# Altium PCB 4WD_V1.0.PcbDoc
Units mil, origin at the board's own origin, x right, y up, seen from the top; angles counter-clockwise.
Board outline 6000 x 4000 mil, 2 copper layers (Top Layer, Bottom Layer); 10 components, 0 nets, 40 pads, 0 vias.
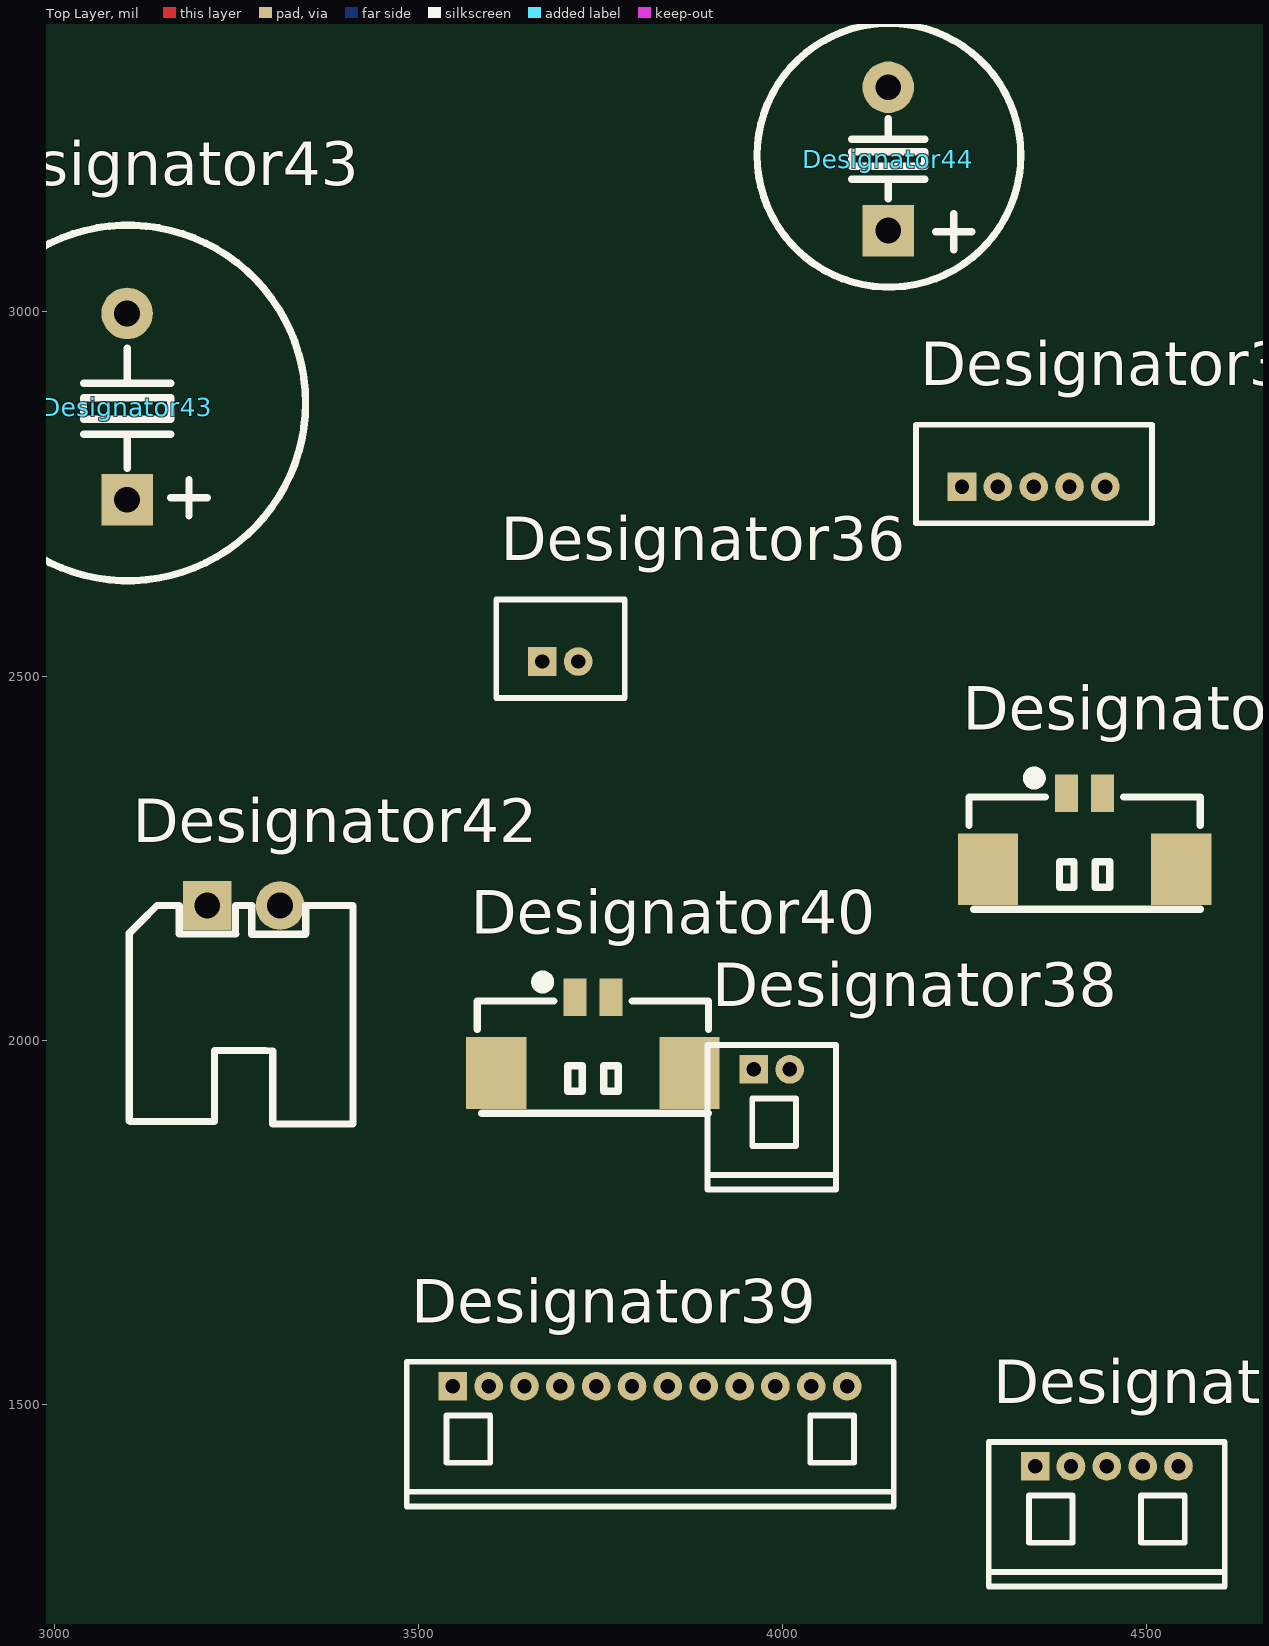
[diagram p0: Top Layer view]
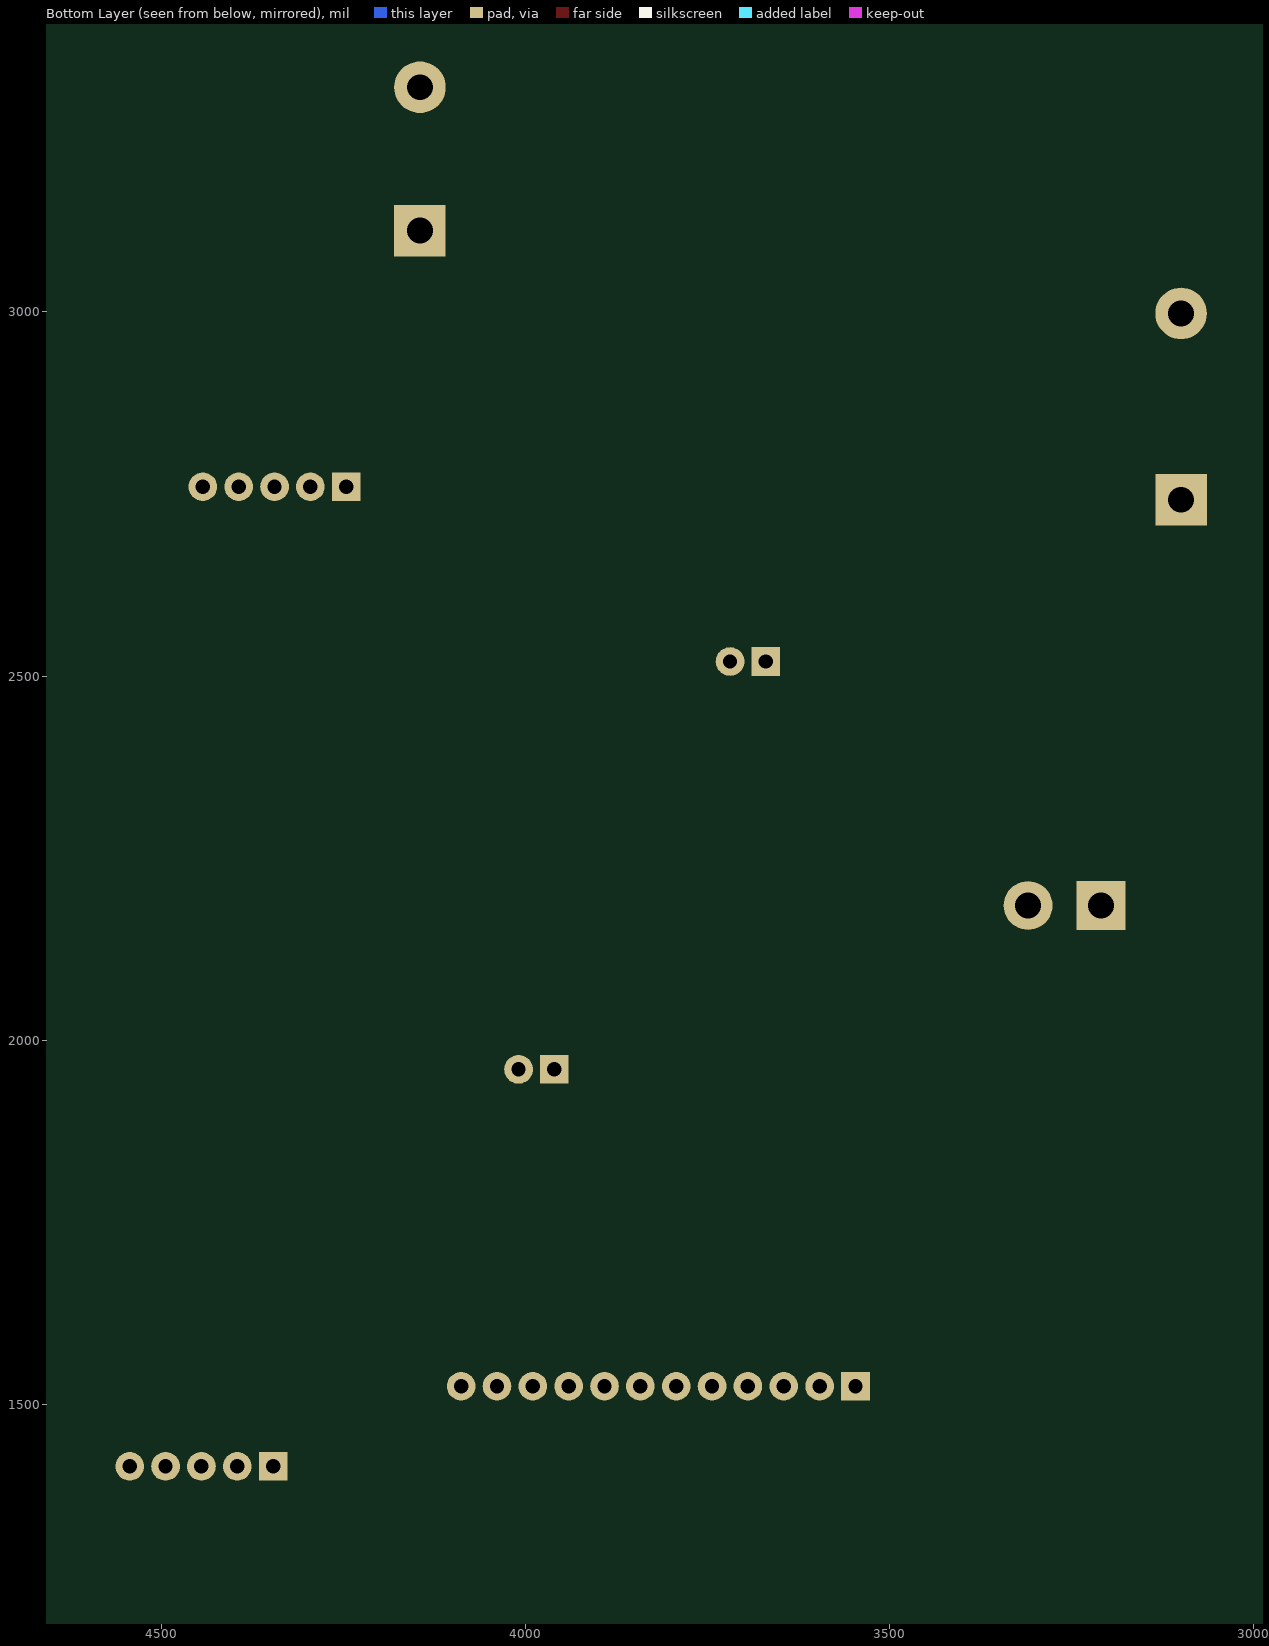
[diagram p1: Bottom Layer view, seen from below]

## Layer stack, top to bottom
Top Solder: solder mask 0.4, Solder Resist, Dk 3.5
Top Layer: signal copper 1.4
Dielectric 1: dielectric 12.6, FR-4, Dk 4.8
Bottom Layer: signal copper 1.4
Bottom Solder: solder mask 0.4, Solder Resist, Dk 3.5

## Board outline
1000,1000 7000,1000 7000,5000 1000,5000

## Design rules (kind name [scope] priority, off if disabled: settings)
Clearance [All] p1: gap=10
PolygonConnect [All] p1: connectstyle=Relief reliefconductorwidth=10 reliefentries=4 polygonreliefangle="90 Angle" airgapwidth=10
RoutingVias [All] p1: holewidth=28 width=50 viastyle="Through Hole" minholewidth=28 minwidth=50 maxholewidth=28 maxwidth=50
SolderMaskExpansion [All] p1: expansion=4
Width [All] p1: maxlimit=10 minlimit=10 preferedwidth=10
30 further rules are at their usual default settings.

## Components (designator, comment, footprint, x,y, rotation, side; value= is the part's Value field where it differs from the comment)
Designator35 "Comment" "MX 1.25-LI-5P" 4345,2760 r0 top
Designator36 "Comment" "MX 1.25-LI-2P" 3695,2520 r0 top
Designator37 "Comment" "MX 1.25-LS-2P" 4415,2250 r0 top
Designator38 "Comment" "MX 1.25-WI-2P" 3985,1960 r0 top
Designator39 "Comment" "MX 1.25-WI-12P" 3818.15,1525 r0 top
Designator40 "Comment" "MX 1.25-LS-2P" 3740,1970 r0 top
Designator41 "Comment" "MX 1.25-WI-5P" 4445,1415 r0 top
Designator42 "Comment" XH2.54-WI-2P 3260,2185 r0 top
Designator43 "Comment" "BEEP 6.5x12x8.5" 3100,2870 r0 top
Designator44 "Comment" "BEEP 5x9x5.5" 4145,3210 r0 top

## Footprints (in the part's own frame and the unit in brackets; to place one, negate y for a bottom-side part, rotate by r counter-clockwise, add the part's x,y. Pads: shape width x height; smd on the part's side, far side on the other; paste and mask are expansions set on the pad)
"BEEP 5x9x5.5" [mm] "5*9*5.5mm(脚距,直径,高度)"
  rect 1.8x1.8 hole 0.9: 1(0,-2.5)
  round 1.8 hole 0.9: 2(0,2.5)
  silkscreen extent -4.58,-4.47 4.62,4.72, body extent -4.5,-4.5 4.5,4.5, height 5.45
"BEEP 6.5x12x8.5" [mm] "6.5*12*8.5mm(脚距,直径,高度)"
  rect 1.8x1.8 hole 0.9: 1(0,-3.25)
  round 1.8 hole 0.9: 2(0,3.25)
  silkscreen extent -6.18,-6.07 6.22,6.32, body extent -6,-6 6,6, height 8.55
"MX 1.25-LI-2P" [mm] "长：4.25mm，宽：3.2mm，高：4.2mm"
  rect 1x1 hole 0.5: 1(-0.635,0)
  round 1 hole 0.5: 2(0.615,0)
  silkscreen extent -2.24,-1.27 2.24,2.16, body extent -2.12,-1.15 2.12,2.05, height 4.25
"MX 1.25-LI-5P" [mm] "长：8mm，宽：3.2mm，高：4.2mm"
  rect 1x1 hole 0.5: 1(-2.51,0)
  round 1 hole 0.5: 2(-1.26,0) 3(-0.01,0) 4(1.24,0) 5(2.49,0)
  silkscreen extent -4.11,-1.27 4.11,2.16, body extent -4,-1.15 4,2.05, height 4.25
"MX 1.25-LS-2P" [mm] "长：7.25m，宽：3.7mm，高：4.7mm"
  rect 2.1x2.5 smd: 0(-3.382,-0.381) 0(3.354,-0.381)
  rect 0.8x1.3 smd: 1(-0.639,2.261) 2(0.611,2.261)
  silkscreen extent -4.04,-1.78 4.02,2.99, body extent -3.83,-1.6 3.83,2.5, height 4.7
"MX 1.25-WI-2P" [mm] "长：4.25mm，宽：1.8mm，高：3.3mm"
  rect 1x1 hole 0.5: 1(-0.625,0)
  round 1 hole 0.5: 2(0.625,0)
  silkscreen extent -2.24,-4.19 2.24,0.85, body extent -2.12,-4.05 2.12,0.85, height 3.35
"MX 1.25-WI-5P" [mm] "长：8mm，宽：1.8mm，高：3.3mm"
  rect 1x1 hole 0.5: 1(-2.5,0)
  round 1 hole 0.5: 2(-1.25,0) 3(0,0) 4(1.25,0) 5(2.5,0)
  silkscreen extent -4.11,-4.19 4.11,0.85, body extent -4,-4.05 4,0.85, height 3.35
"MX 1.25-WI-12P" [mm] "长：16.75mm，宽：1.8mm，高：3.3mm"
  rect 1x1 hole 0.5: 1(-6.885,0)
  round 1 hole 0.5: 2(-5.635,0) 3(-4.385,0) 4(-3.135,0) 5(-1.885,0) 6(-0.635,0) 7(0.615,0) 8(1.865,0) 9(3.115,0) 10(4.365,0) 11(5.615,0) 12(6.865,0)
  silkscreen extent -8.49,-4.19 8.49,0.85, body extent -8.38,-4.05 8.38,0.85, height 3.35
XH2.54-WI-2P [mm] "接插件，2P"
  rect 1.7x1.7 hole 0.9: 1(-1.27,0)
  round 1.7 hole 0.9: 2(1.27,0)
  silkscreen extent -3.99,-7.62 3.81,0, body extent -3.77,-7.35 3.77,0.35, height 5.73

## Nets (pads, with @x,y where several pads share a name; then routed paths per layer and width w, separated by ;. In a path a pad name is that pad's centre, name@x,y a point inside that pad or via, vN(x,y) a via of type N, cw(c..) or ccw(c..) an arc to the next point about the centre after c; other vN are vias at no path point)
pads on no net: Designator35.1 Designator35.2 Designator35.3 Designator35.4 Designator35.5 Designator36.1 Designator36.2 Designator37.0 Designator37.1 Designator37.2 Designator38.1 Designator38.2 Designator39.1 Designator39.2 Designator39.3 Designator39.4 Designator39.5 Designator39.6 Designator39.7 Designator39.8 Designator39.9 Designator39.10 Designator39.11 Designator39.12 Designator40.0 Designator40.1 Designator40.2 Designator41.1 Designator41.2 Designator41.3 Designator41.4 Designator41.5 Designator42.1 Designator42.2 Designator43.1 Designator43.2 Designator44.1 Designator44.2